# Altium PCB MINI 905 DEMO.PcbDoc
Units mil, origin at the board's own origin, x right, y up, seen from the top; angles counter-clockwise.
Board outline 1532 x 2113 mil, 2 copper layers (Top Layer, Bottom Layer); 24 components, 25 nets, 100 pads, 15 vias.
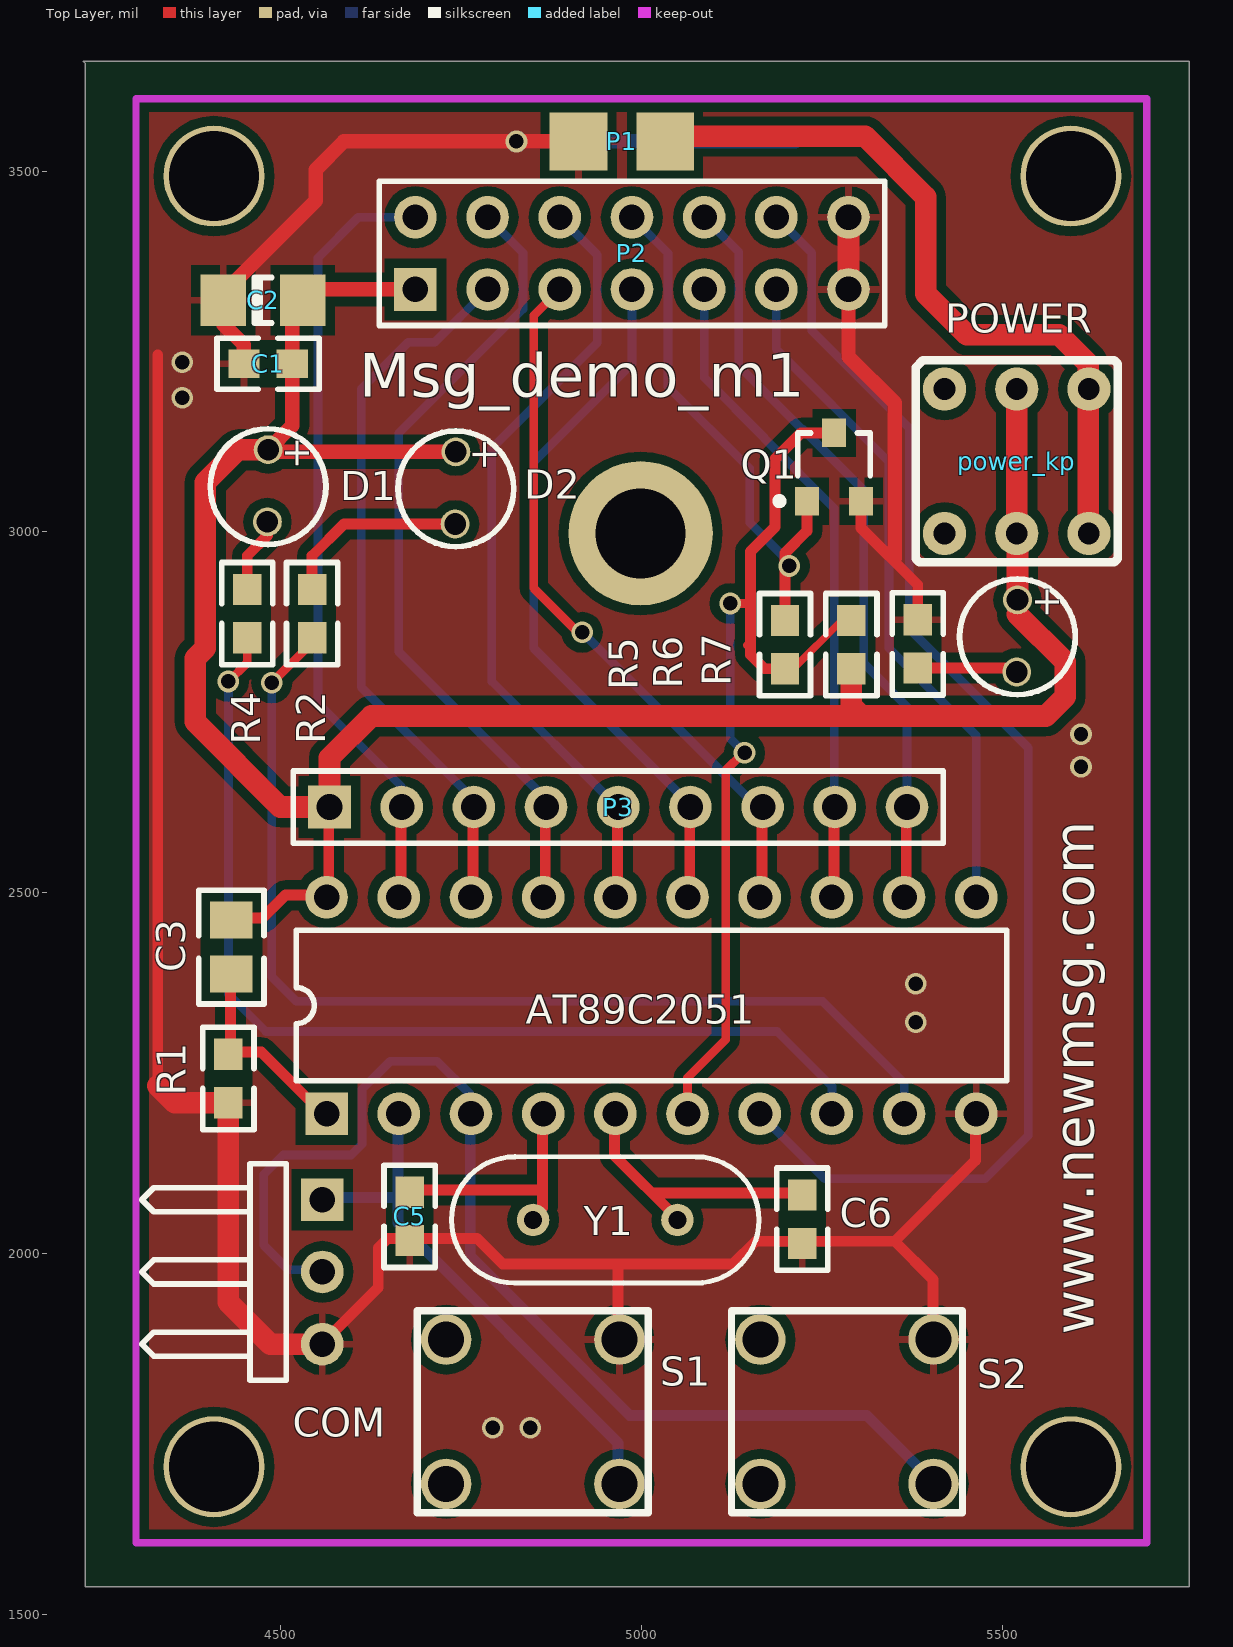
[diagram p0: Top Layer view]
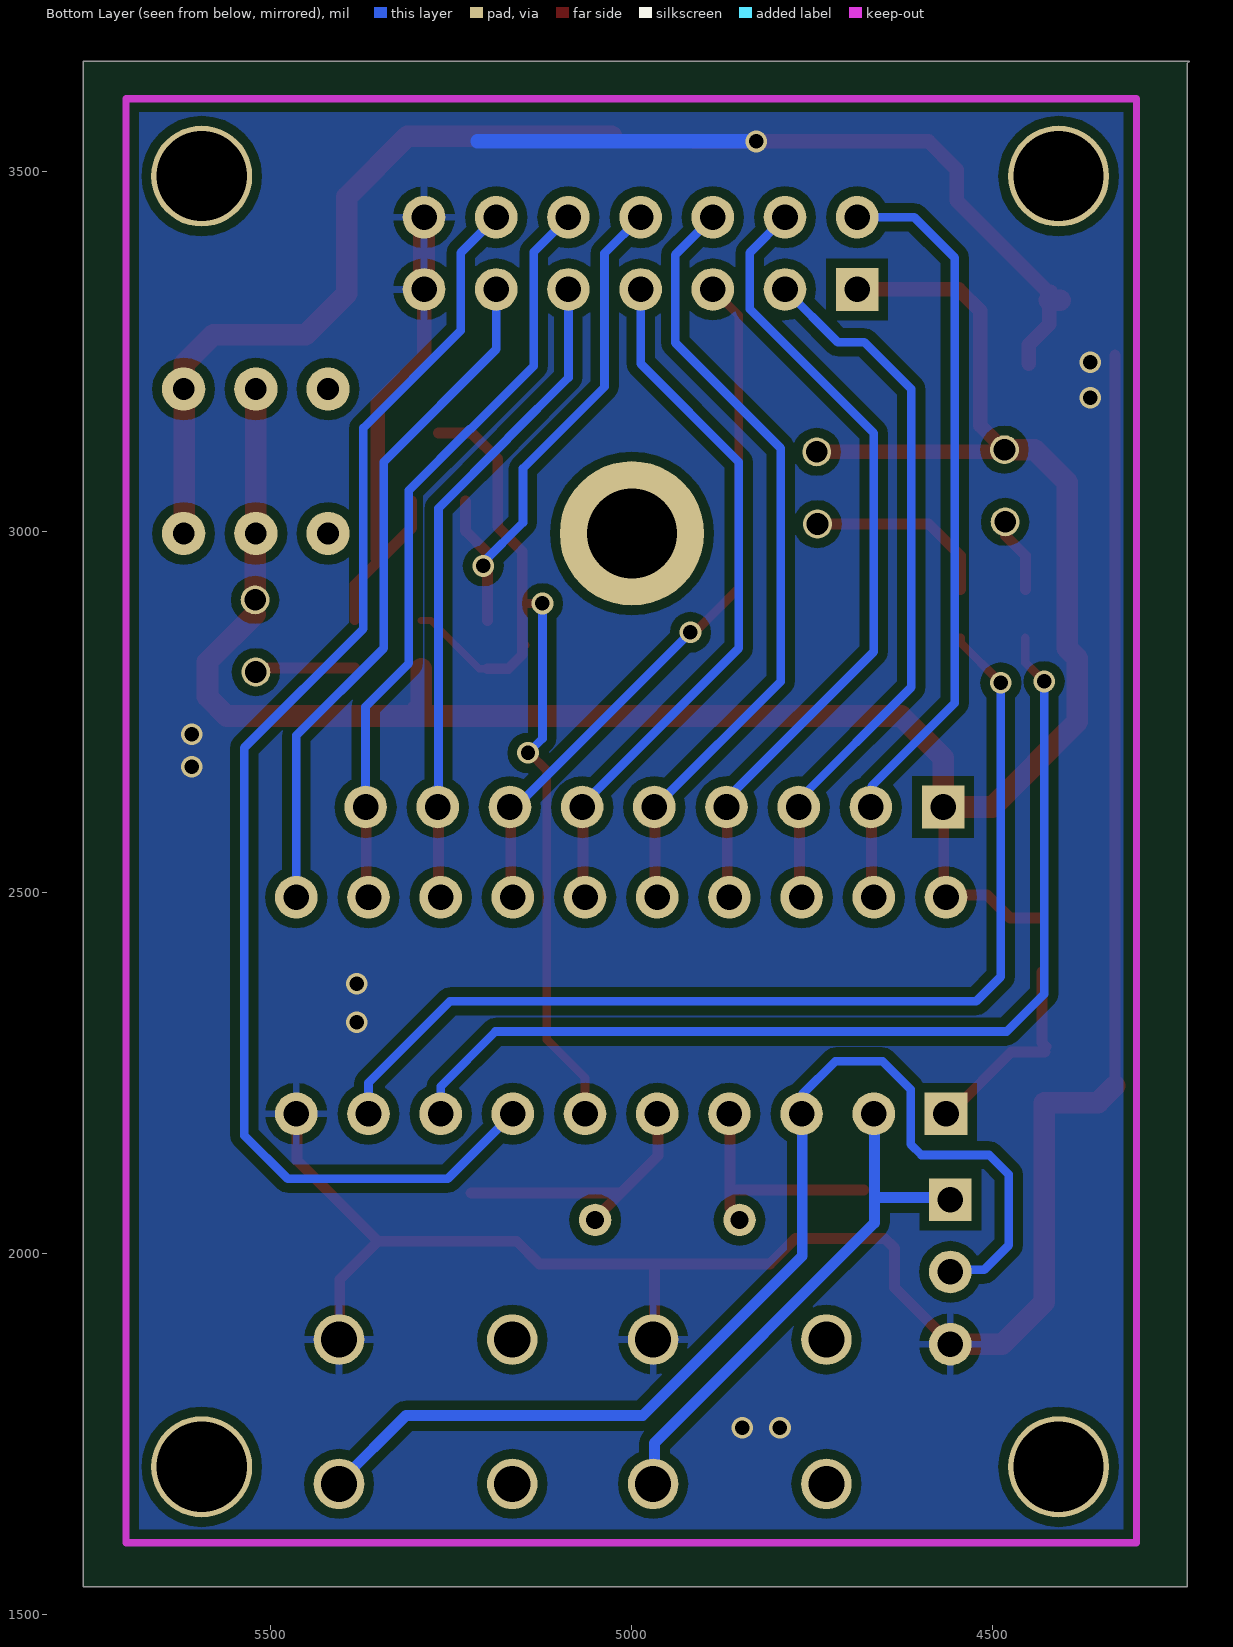
[diagram p1: Bottom Layer view, seen from below]

## Layer stack, top to bottom
Top Layer: signal copper 1.4
Dielectric: dielectric 12.6, FR-4, Dk 4.8
Bottom Layer: signal copper 1.4

## Board outline
4227,3652 5759,3652 5759,1539 4230,1539 4230,3649

## Design rules (kind name [scope] priority, off if disabled: settings)
Clearance [All] p1: gap=9
ComponentClearance [All] p1: gap=10 collisioncheckmode=0
PolygonConnect [All] p1: connectstyle=Relief reliefconductorwidth=10 reliefentries=4 polygonreliefangle="90 Angle"
RoutingVias [All] p1: holewidth=28 width=50 viastyle="Through Hole" minholewidth=28 minwidth=50 maxholewidth=28 maxwidth=50
SolderMaskExpansion [All] p1: expansion=4
TestPointUsage [All] p1: valid=0 allowmultiple=FALSE
Testpoint [All] p1: side=15 testpointundercomponent=TRUE minsize=40 maxsize=100 preferedsize=60 minholesize=0 maxholesize=40 preferedholesize=32 testpointgrid=1 style=1023 order=1234567890
Width [All] p1: maxlimit=100 minlimit=10 preferedwidth=10 toplayer_prefwidth=30 minimp=50.000000 maximp=50.000000 favimp=50.000000
17 further rules are at their usual default settings.

## Components (designator, comment, footprint, x,y, rotation, side; value= is the part's Value field where it differs from the comment)
AT89C2051 "51" CDIP20 5014,2344 r0 top
C1 "Cap" C1608-0603 4483,3233 r180 top
C2 "Cap" CC3216-1206 4476,3321 r0 top
C3 "Cap" R2012-0805 4432,2425 r90 top
C5 "Cap" C1608-0603 4679,2052 r90 top
C6 "Cap" C1608-0603 5223,2048 r90 top
COM "Header 3H" HDR1X3H 4558,2075 r270 top (schematic designator P4)
D1 "Res2" LED_3 4183,3414 r90 top (schematic designator LED1)
D2 "Res2" LED_3 4443,3411 r90 top (schematic designator LED0)
P1 "Header 2H" HDR1X2H 5013,3541 r180 top
P2 "Header 7X2" HDR2X7 4687,3336 r0 top
P3 "Header 9" HDR1X9 4568,2619 r0 top
POWER "Res2" LED_3 5221,3206 r90 top (schematic designator LED3)
power_kp "key3" S_2 5496,3018 r180 top
Q1 "NPN" SOT23 5267,3090 r0 top
R1 "Res2" C1608-0603 4428,2243 r90 top
R2 "Res2" C1608-0603 4544,2887 r90 top
R4 "Res2" C1608-0603 4454,2887 r90 top
R5 "Res2" C1608-0603 5199,2844 r90 top
R6 "Res2" C1608-0603 5291,2844 r90 top
R7 "Res2" C1608-0603 5383,2845 r270 top
S1 "SW-PB" PCBComponent_1 5403,1883 r180 top
S2 "SW-PB" PCBComponent_1 4967.82,1883 r180 top
Y1 "XTAL" CRYSTAL 5069,2050 r0 top

## Footprints (in the part's own frame and the unit in brackets; to place one, negate y for a bottom-side part, rotate by r counter-clockwise, add the part's x,y. Pads: shape width x height; smd on the part's side, far side on the other; paste and mask are expansions set on the pad)
C1608-0603 [mm] "Chip Resistor; Body 1.6 x 0.8 mm (LxW typ)"
  rect 1.1x1 smd: 1(-0.85,0) 2(0.85,0)
  silkscreen extent -1.8,-0.9 1.8,0.9
CC3216-1206 [mm] "Chip Capacitor; Body 3.2 x 1.6 mm (LxW typ)"
  rect 1.6x1.8 smd: 1(-1.4,0) 2(1.4,0)
  silkscreen extent -0.3,-0.8 0.3,0.8
CDIP20 [mm] "DIP; 20 Leads; Row Spacing 7.62 mm; Pitch 2.54 mm"
  rect 1.5x1.5 hole 0.9: 1(-11.43,-3.81)
  round 1.5 hole 0.9: 2(-8.89,-3.81) 3(-6.35,-3.81) 4(-3.81,-3.81) 5(-1.27,-3.81) 6(1.27,-3.81) 7(3.81,-3.81) 8(6.35,-3.81) 9(8.89,-3.81) 10(11.43,-3.81) 11(11.43,3.81) 12(8.89,3.81) 13(6.35,3.81) 14(3.81,3.81) 15(1.27,3.81) 16(-1.27,3.81) 17(-3.81,3.81) 18(-6.35,3.81) 19(-8.89,3.81) 20(-11.43,3.81)
  silkscreen extent -12.5,-2.65 12.5,2.65
CRYSTAL [mil] "CRYSTAL"
  round 45 hole 25: 1(-219,-3) 2(-19,-3)
  silkscreen extent -332,-91 94,85
HDR1X2H [mil] "Connector; Header; 2 Position; Right Angle"
  rect 80x80 smd: 1(-20,0) 2(100,0)
HDR1X3H [mm] "Connector; Header; 3 Position; Right Angle"
  rect 1.5x1.5 hole 0.9: 1(0,0)
  round 1.5 hole 0.9: 2(2.54,0) 3(5.08,0)
  silkscreen extent -1.27,-6.35 6.35,-1.27
HDR1X9 [mm] "Connector; Header; 9 Position"
  rect 1.5x1.5 hole 0.9: 1(0,0)
  round 1.5 hole 0.9: 2(2.54,0) 3(5.08,0) 4(7.62,0) 5(10.16,0) 6(12.7,0) 7(15.24,0) 8(17.78,0) 9(20.32,0)
  silkscreen extent -1.27,-1.27 21.59,1.27
HDR2X7 [mm] "Connector; Header; 7x2 Position"
  rect 1.5x1.5 hole 0.9: 1(0,0)
  round 1.5 hole 0.9: 2(0,2.54) 3(2.54,0) 4(2.54,2.54) 5(5.08,0) 6(5.08,2.54) 7(7.62,0) 8(7.62,2.54) 9(10.16,0) 10(10.16,2.54) 11(12.7,0) 12(12.7,2.54) 13(15.24,0) 14(15.24,2.54)
  silkscreen extent -1.27,-1.27 16.51,3.81
LED_3 [mil] "LED_3"
  round 40 hole 30: 1(-400,-299) 2(-300,-300)
  silkscreen extent -431,-380 -271,-220
PCBComponent_1 [mil]
  round 70 hole 50: 1(-1.82,201.67) 1(238.18,201.67) 2(-1.82,1.67) 2(238.18,1.67)
  silkscreen extent -42,-38 278,242
R2012-0805 [mm] "Thermistor; 2 Leads"
  rect 1.3x1.5 smd: 1(-0.95,0) 2(0.95,0)
  silkscreen extent -2,-1.15 2,1.15
S_2 [mil] "S_2"
  round 60 hole 30: 1(76,-180) 2(76,20) 3(-24,-180) 4(-24,20) 5(-124,-180) 6(-124,20)
  silkscreen extent -164,-220 116,60
SOT23 [mm] "SOT-23; 3 Leads; Body 3.0 x 2.5 mm, inc. leads (LxW max)"
  rect 0.85x1 smd: 1(-0.95,-1.2) 2(0.95,-1.2) 3(0,1.2)
  silkscreen extent -2.05,-1.32 1.28,1.2

## Part data
AT89C2051: library part at89c2051
C1 C2 C3 C5 C6: "Capacitor"
COM: "Header, 3-Pin, Right Angle"
D1 D2 POWER R1 R2 R4 R5 R6 R7: "Resistor"
P1: "Header, 2-Pin, Right Angle"
P2: "Header, 7-Pin, Dual row"
P3: "Header, 9-Pin"
Q1: "NPN Bipolar Transistor"
S1 S2: "Switch"
Y1: "Crystal Oscillator"

## Free pads (board coordinates)
  round 140 hole 125: 0(4408,1705) 0(4408,3493) 0(5595,1705) 0(5595,3493)
  round 200 hole 125: 0(4999,2998)

## Via types
v1: diameter 30, hole 20, Top Layer to Bottom Layer, 15 vias

## Nets (pads, with @x,y where several pads share a name; then routed paths per layer and width w, separated by ;. In a path a pad name is that pad's centre, name@x,y a point inside that pad or via, vN(x,y) a via of type N, cw(c..) or ccw(c..) an arc to the next point about the centre after c; other vN are vias at no path point)
AM: AT89C2051.15 P2.7 P3.6 | length 993.3
  Top Layer w10: AT89C2051.15@5055,2501 AT89C2051.15@5067,2513
  Top Layer w15: AT89C2051.15@5067,2501 P3.6@5067,2622
  Bottom Layer w12: P2.7 4987,3233 4851,3097 4851,2839 5061,2629 P3.6@5061,2624
CD: AT89C2051.16 P2.6 P3.5 | length 1096.5
  Top Layer w10: AT89C2051.16@4963,2497 AT89C2051.16@4967,2501
  Top Layer w15: AT89C2051.16@4967,2501 P3.5@4967,2622
  Bottom Layer w12: P2.6 4939,3384 4939,3262 4793,3116 4793,2793 4964,2622 P3.5@4967,2622
CE: AT89C2051.18 P2.3 P3.3 | length 1001.2
  Top Layer w10: AT89C2051.18@4753,2499 4767,2513 AT89C2051.18@4767,2514
  Top Layer w15: AT89C2051.18@4767,2514 P3.3@4767,2622
  Bottom Layer w12: P3.3@4767,2622 4767,2630 4612,2785 4612,3198 4677,3263 4714,3263 P2.3
CSN: AT89C2051.7 P2.12 | length 1850.7
  Bottom Layer w12: AT89C2051.7 5254,2104 5476,2104 5536,2164 5536,2701 5371,2866 5371,3144 5236,3279 5236,3387 P2.12
DR: P2.8 Q1.1 R5.2 | length 751.3
  Top Layer w15: R5.2 5199,2971 5229.6,3001.6 Q1.1
  Bottom Layer w12: P2.8 5037,3386 5037,3201 5150,3088 5150,3013 5205,2958 v1(5205,2953)
GND: AT89C2051.10 C1.2 C2.1 C5.1 C6.1 COM.3 P1.2 P2.13 P2.14 Q1.2 R1.1 R7.1 S1.2@5404.82,1881.33 S2.2@4969.64,1881.33 | length 4764.6
  Top Layer w10: 4967.82,1981.82 4967.82,1985.82 ; S1.2@5402,1858 S1.2@5402,1884.33
  Top Layer w15: 4330,2233 4330,3245 ; COM.3@4557,1878 4560,1878 4635.46,1953.46 4635.46,2008 4649,2021.54 4772.46,2021.54 4808,1986 5127,1986 5158.54,2017.54 5350.95,2017.54 ; S2.2@4967.82,1880.33 4967.82,1981.82 ; Q1.2 5304.4,3005.6 5383,2927 R7.1 ; S1.2@5403.82,1884.33 5403.82,1964.67 5350.95,2017.54 ; AT89C2051.10@5463,2197 5463,2129.59 5350.95,2017.54
  Top Layer w20: C2.1@4419,3333 4423,3333 4549,3459 4549,3502 4588,3541 P1.2 ; C2.1@4421,3308 4421,3288 4449.54,3259.46 C1.2 ; P2.13 5287,3243 5351,3179 5351,2964
  Top Layer w30: 4330,2233 4353.46,2209.54 R1.1 4428,1933 4486,1875 COM.3 ; C2.1@4406,3321 C2.1 ; P2.13 P2.14
  Bottom Layer w20: v1(4827,3541) 5213,3541
  other v1: 4794,1759 4846,1759 5380,2321 5380,2374 5609,2675 5609,2720 4364,3186 4364,3235
INT0: AT89C2051.6 Q1.3 R5.1 R6.2 | length 1341.5
  Top Layer w10: R5.1 5210.54,2810.54 5277.46,2877.46 R6.2
  Top Layer w12: AT89C2051.6 5064,2244 5117,2297 5117,2670 5141,2694 v1(5143,2694) ; v1(5123,2901) 5149,2901 5151,2899 ; 5147,2843 5151,2847
  Top Layer w15: R5.1 5170.46,2810.54 5151,2830 5151,2973 5185,3007 5185,3101 5221.24,3137.24 Q1.3
  Bottom Layer w12: v1(5123,2901) 5123,2714 v1(5143,2694)
KS1: AT89C2051.2 COM.1 S2.1@4969.64,1681.33 | length 750.2
  Bottom Layer w15: COM.1@4557,2078 4660,2078 4663,2081 ; AT89C2051.2@4663,2197 4663,2043 4967.82,1738.18 S2.1@4967.82,1680.33
KS2: AT89C2051.3 COM.2 S1.1@5404.82,1681.33 | length 1590
  Bottom Layer w12: COM.2@4557,1978 4511,1978 4477,2012 4477,2110 4504,2137 4598,2137 4613,2152 4613,2228 4652,2267 4717,2267 AT89C2051.3@4763,2221
  Bottom Layer w15: AT89C2051.3@4763,2210 4763,1997 4984,1776 5312.15,1776 S1.1@5403.82,1684.33
LED1: AT89C2051.8 R4.1 | length 1431.3
  Top Layer w12: v1(4428,2793) 4454,2819 R4.1
  Bottom Layer w12: v1(4428,2793) 4428,2360 4480,2308 5188,2308 5264,2232 AT89C2051.8
LED2: AT89C2051.9 R2.1 | length 1472.6
  Top Layer w12: v1(4488,2791) 4544,2847 R2.1
  Bottom Layer w12: v1(4488,2791) 4488,2384 4522,2350 5251,2350 5364,2237 AT89C2051.9
MISO: AT89C2051.13 P2.9 P3.8 | length 918.6
  Top Layer w10: AT89C2051.13@5263,2497 AT89C2051.13@5267,2501
  Top Layer w15: AT89C2051.13@5267,2501 P3.8@5267,2622
  Bottom Layer w12: P2.9 5087,3214 5171,3130 5171,3129 5267,3033 5267,2648 5268,2647 P3.8
MOSI: AT89C2051.12 P2.10 P3.9 | length 1055
  Top Layer w15: AT89C2051.12@5367,2501 P3.9@5367,2622
  Bottom Layer w12: P2.10 5135,3388 5135,3230 5222,3143 5223,3143 5308,3058 5308,2818 5368,2758 P3.9
NetAT89C2051_4: AT89C2051.4 C5.2 Y1.1 | length 336.3
  Top Layer w15: C5.2@4678,2088.46 4861.46,2088.46 ; Y1.1@4849,2050 4863,2064 AT89C2051.4@4863,2197
NetAT89C2051_5: AT89C2051.5 C6.2 Y1.2 | length 390.1
  Top Layer w10: 5014.54,2084.46 5015.35,2084.46
  Top Layer w15: AT89C2051.5@4963,2197 4963,2136 Y1.2@5049,2050 ; 5015.35,2084.46 C6.2@5222,2084.46
NetLED0_1: D2.1 R2.2 | length 262.8
  Top Layer w15: R2.2 4544,2967 4588,3011 D2.1
NetLED1_1: D1.1 R4.2 | length 105.1
  Top Layer w15: R4.2 4454,2967 4482,2995 D1.1
NetLED3_1: POWER.1 R7.2 | length 139.3
  Top Layer w15: R7.2 5514.46,2811.54 POWER.1
NetP1_1: P1.1 power_kp.5 power_kp.6 | length 1033
  Top Layer w30: P1.1@5027,3548 5310,3548 5394,3464 5394,3330 5451,3273 5579,3273 5619,3233 power_kp.6@5619,3001
PWR: AT89C2051.17 P2.4 P3.4 | length 1125.6
  Top Layer w10: AT89C2051.17@4867,2486 AT89C2051.17@4867,2501
  Top Layer w15: AT89C2051.17@4867,2501 P3.4@4867,2622
  Bottom Layer w12: P2.4 4836,3387 4836,3309 4664,3137 4664,2834 4867,2631 P3.4@4867,2622
RST: AT89C2051.1 C3.1 R1.2 | length 276.2
  Top Layer w15: R1.2@4425,2287 4431,2293 C3.1@4431,2390.6 ; R1.2@4427,2279.46 4473.54,2279.46 4556,2197 AT89C2051.1@4563,2197
SCK: AT89C2051.11 P2.11 | length 956.7
  Bottom Layer w12: P2.11 5187,3253 5343,3097 5343,2839 5464,2718 AT89C2051.11
SHD: AT89C2051.14 P2.5 P3.7 | length 998.2
  Top Layer w10: AT89C2051.14@5167,2493 AT89C2051.14@5167,2494
  Top Layer w12: P2.5 4851,3300 4851,2922 4912,2861 v1(4918,2861)
  Top Layer w15: AT89C2051.14@5167,2494 P3.7@5167,2622
  Bottom Layer w12: v1(4918,2861) 5157,2622 P3.7@5167,2622
TXEN: AT89C2051.19 P2.2 P3.2 | length 1090.5
  Top Layer w10: AT89C2051.19@4663,2497 AT89C2051.19@4667,2501
  Top Layer w15: AT89C2051.19@4667,2501 P3.2@4667,2622
  Bottom Layer w12: P3.2@4667,2622 4667,2648 4552,2763 4552,3380 4608,3436 P2.2
VCC: AT89C2051.20 C1.1 C2.2 C3.2 D1.2 D2.2 P2.1 P3.1 POWER.2 power_kp.3 power_kp.4 R6.1 | length 3247.6
  Top Layer w10: AT89C2051.20@4563,2497 AT89C2051.20@4567,2501
  Top Layer w15: C3.2@4431,2465.4 4475.4,2465.4 4507,2497 AT89C2051.20@4563,2497 ; AT89C2051.20@4567,2501 P3.1@4567,2622
  Top Layer w20: P2.1 4546.12,3336 4516.46,3306.35 4516.46,3147.46 D1.2 4486,3111 D2.2 ; 5521,2886 POWER.2
  Top Layer w30: D1.2 4441,3114 4396,3069 4396,2839 4382,2825 4382,2737 4500,2619 P3.1 4568,2687 4626,2745 5560,2745 5587,2772 5587,2820 5521,2886 ; R6.1 5291,2759 5305,2745 ; power_kp.3 power_kp.4 5521,2997 POWER.2
pads on no net: power_kp.1 power_kp.2 S1.1@5164.82,1681.33 S1.2@5164.82,1881.33 S2.1@4729.64,1681.33 S2.2@4729.64,1881.33

## Polygon pours and split planes (outlines as drawn)
GND on Top Layer (solid, remove dead copper): 5700,3600 5700,1600 4300,1600 4300,3600
GND on Bottom Layer (solid, remove dead copper): 5700,3600 5700,1600 4300,1600 4300,3600

## Keep-outs
Keep-Out Layer:
  lines w10: 4300,1600 4300,3600 5700,3600 5700,1600 4300,1600

## Silkscreen, mask and mechanical layers (free items; w line width, h text height)
Top Overlay:
  text "Msg_demo_m1" at 4609,3187 h60
  text "www.newmsg.com" at 5627,1888 h55 r90

## Text inside footprints (layer, text, board x,y; h text height)
D1: Top Overlay "+" at 4540,3086 h40 r90
D2: Top Overlay "+" at 4800,3084 h40 r90
POWER: Top Overlay "+" at 5579,2880 h40 r90